# EAGLE board arduino shield - Copy (EAGLE 7.5.0)
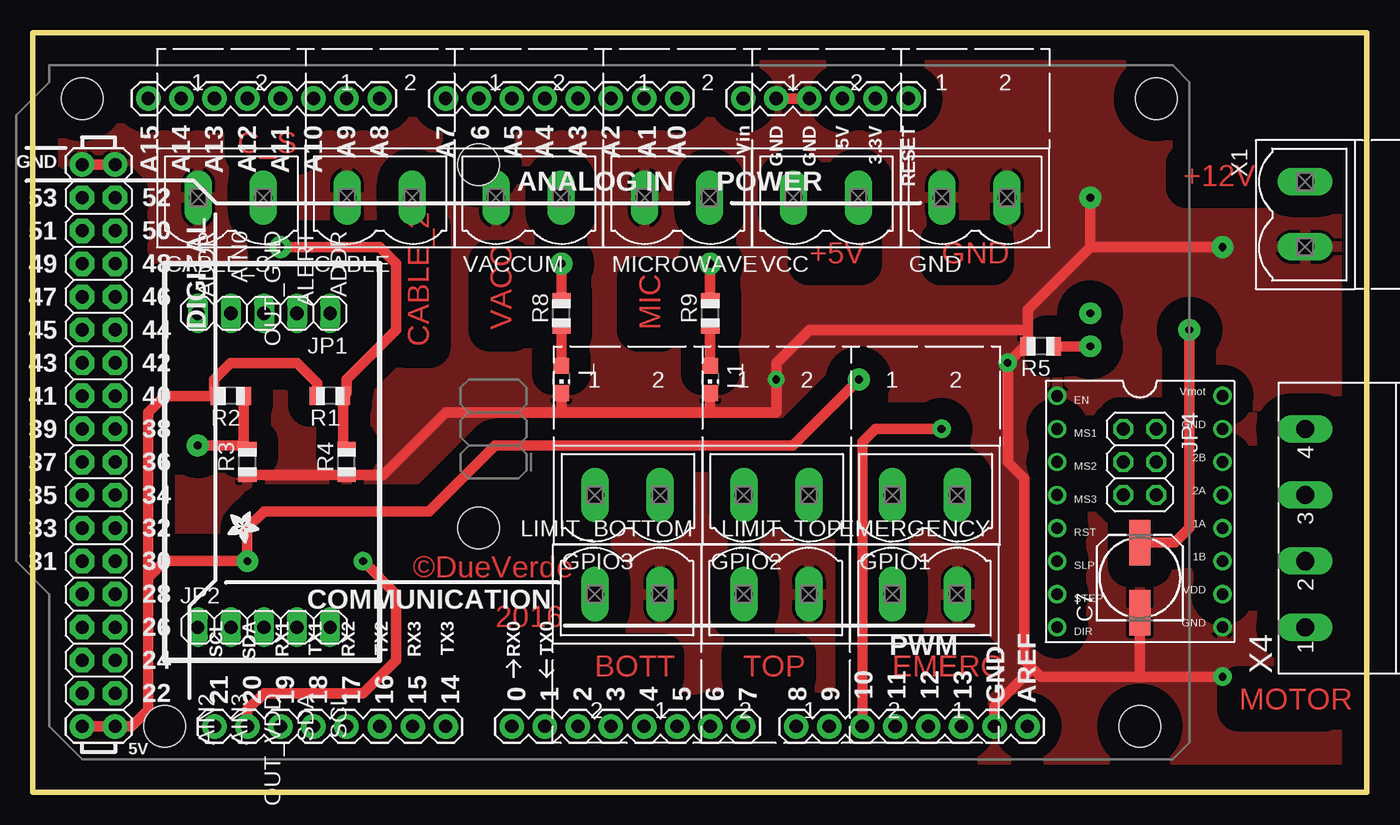
[diagram p0: board, top side]
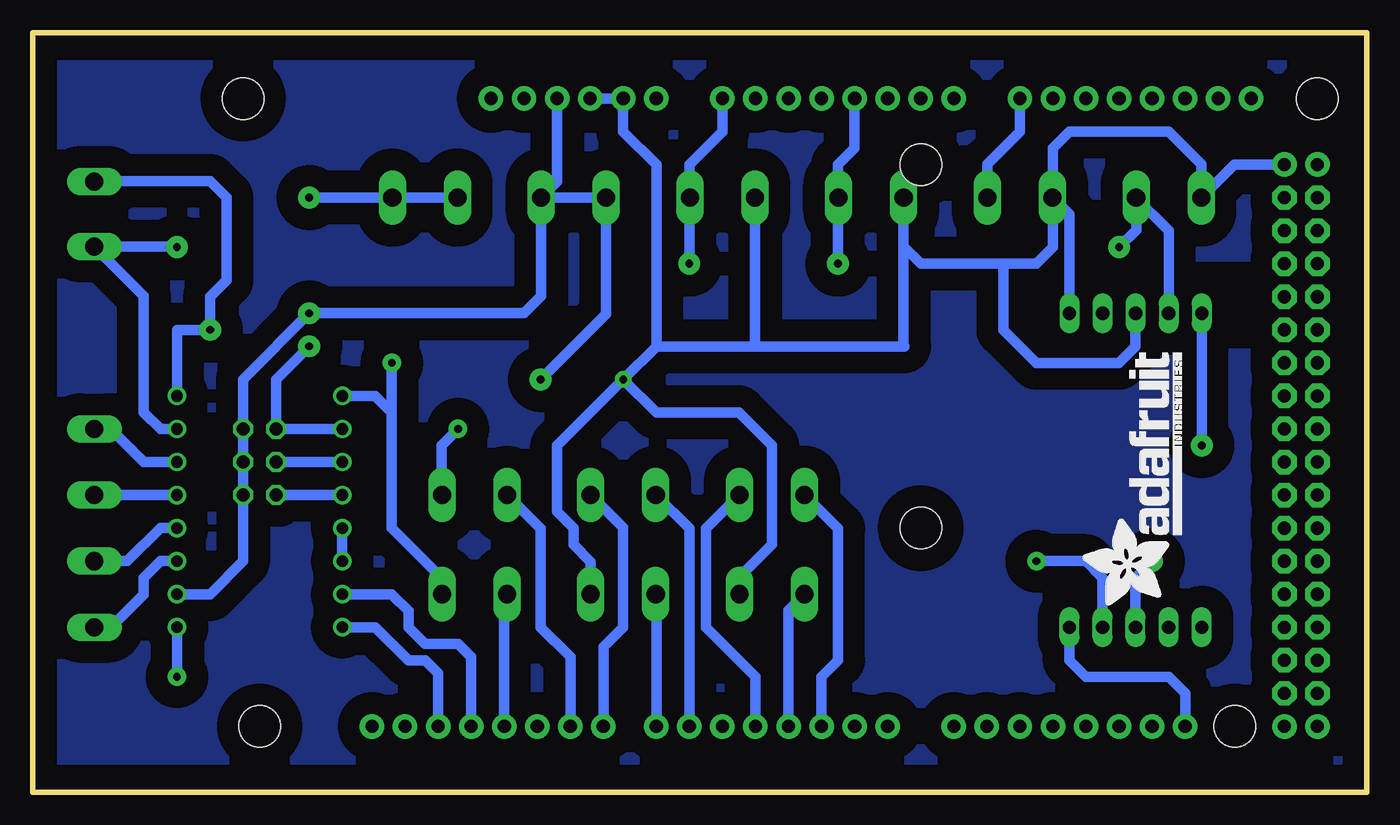
[diagram p1: board, bottom side, seen from below]

Size 102.54 x 58.41 mm. Coordinates in mm from the lower left corner, seen from the top.
Outline: 0,0 102.54,0 102.54,58.41 0,58.41 0,0
Copper layers (1*16): Top 0.035mm / dielectric 1.5mm / Bottom 0.035mm
Design rules "default": minimum track width 10mil, minimum drill 24mil, track to track 8mil, track to pad 8mil, pad to pad 8mil, via to via 8mil, smd to smd 8mil, copper to edge 40mil, drill to drill 8mil, minimum pad ring 10mil, minimum via ring 8mil, stop-mask expansion 4mil, vias tented up to drill 0mil, thermal gap 10mil
Net classes: 2 gnd: width 0.203 mm, drill 0.559 mm, clearance 0.152 mm

## Footprints (pad centres in the part's own frame; a part is rotated, then mirrored left to right if it is on the bottom)
153CLV-0605 = smd 3.5 x 1.6: + 2.7,0; - -2.7,0
MSTBV2 = drill 1.397 long: 1 -2.5,0; 2 2.5,0
1X05 = drill 1.016 long: 1 -5.08,0; 2 -2.54,0; 3 0,0; 4 2.54,0; 5 5.08,0
2X03 = drill 1.016 octagon: 1 -2.54,-1.27; 2 -2.54,1.27; 3 0,-1.27; 4 0,1.27; 5 2.54,-1.27; 6 2.54,1.27
CHIP-LED0805 = smd 1.2 x 1.2: A 0,-1.05; C 0,1.05
R0805 = smd 1.1 x 1.4: 1 -1,0; 2 1,0
ARDUINO_MEGA-PRO-5V = drill 1.016 pad 1.88: 0 52.07,50.8; 1 49.53,50.8; 2 46.99,50.8; 3 44.45,50.8; 3.3V 24.13,2.54; 4 41.91,50.8; 5 39.37,50.8; 5V@0 26.67,2.54; 5V@1 82.55,50.8; 5V@2 85.09,50.8; 6 36.83,50.8; 7 34.29,50.8; 8 30.226,50.8; 9 27.686,50.8; 10 25.146,50.8; 11 22.606,50.8; 12 20.066,50.8; 13 17.526,50.8; 14 57.15,50.8; 15 59.69,50.8; 16 62.23,50.8; 17 64.77,50.8; 18 67.31,50.8; 19 69.85,50.8; 20 72.39,50.8; 21 74.93,50.8; A0 39.37,2.54; A1 41.91,2.54; A2 44.45,2.54; A3 46.99,2.54; A4 49.53,2.54; A5 52.07,2.54; A6 54.61,2.54; A7 57.15,2.54; A8 62.23,2.54; A9 64.77,2.54; A10 67.31,2.54; A11 69.85,2.54; A12 72.39,2.54; A13 74.93,2.54; A14 77.47,2.54; A15 80.01,2.54; AREF 12.446,50.8; GND@0 29.21,2.54; GND@1 31.75,2.54; GND@2 82.55,7.62; GND@3 85.09,7.62; GND@4 14.986,50.8; RESET 21.59,2.54; VIN 34.29,2.54 | drill 1.016 pad 1.88 octagon: 22 82.55,48.26; 23 85.09,48.26; 24 82.55,45.72; 25 85.09,45.72; 26 82.55,43.18; 27 85.09,43.18; 28 82.55,40.64; 29 85.09,40.64; 30 82.55,38.1; 31 85.09,38.1; 32 82.55,35.56; 33 85.09,35.56; 34 82.55,33.02; 35 85.09,33.02; 36 82.55,30.48; 37 85.09,30.48; 38 82.55,27.94; 39 85.09,27.94; 40 82.55,25.4; 41 85.09,25.4; 42 82.55,22.86; 43 85.09,22.86; 44 82.55,20.32; 45 85.09,20.32; 46 82.55,17.78; 47 85.09,17.78; 48 82.55,15.24; 49 85.09,15.24; 50 82.55,12.7; 51 85.09,12.7; 52 82.55,10.16; 53 85.09,10.16 | hole 3.2: 3.81,50.8; 2.54,2.54; 54.61,35.56; 54.61,7.62; 78.74,50.8; 85.09,2.54
A4988BREAKOUT = drill 0.9: 1A 8.89,1.27; 1B 11.43,1.27; 2A 6.35,1.27; 2B 3.81,1.27; DIR 16.51,-11.43; EN -1.27,-11.43; GND 16.51,1.27; GND@0 1.27,1.27; MS1 1.27,-11.43; MS2 3.81,-11.43; MS3 6.35,-11.43; RST 8.89,-11.43; SLP 11.43,-11.43; STEP 13.97,-11.43; VDD 13.97,1.27; VMOT -1.27,1.27
MSTBA4 = drill 1.397 long: 1 -7.62,5.08; 2 -2.54,5.08; 3 2.54,5.08; 4 7.62,5.08

## Placement (x,y rotation side)
C7  100uF  [153CLV-0605]  85.09,16.51 90 top
CABLE  [MSTBV2]  26.67,45.72 0 top
CABLE_S  [MSTBV2]  15.24,45.72 0 top
EMERGENCY  [MSTBV2]  68.58,15.24 180 top
GND  [MSTBV2]  72.39,45.72 0 top
GPIO1  [MSTBV2]  68.58,22.86 0 top
GPIO2  [MSTBV2]  57.15,22.86 0 top
GPIO3  [MSTBV2]  45.72,22.86 0 top
JP1  [1X05]  17.78,36.83 180 top
JP2  [1X05]  17.78,12.7 0 top
JP4  [2X03]  85.09,25.4 270 top
L  YELLOW  [CHIP-LED0805]  40.64,31.75 180 top
L1  YELLOW  [CHIP-LED0805]  52.07,31.75 180 top
LIMIT_BOTTOM  [MSTBV2]  45.72,15.24 180 top
LIMIT_TOP  [MSTBV2]  57.15,15.24 180 top
MICROWAVE  [MSTBV2]  49.53,45.72 0 top
R1  100k  [R0805]  22.86,30.48 180 top
R2  100k  [R0805]  15.24,30.48 180 top
R3  100k  [R0805]  16.51,25.4 90 top
R4  100k  [R0805]  24.13,25.4 90 top
R5  100k  [R0805]  77.47,34.29 180 top
R8  100k  [R0805]  40.64,36.83 90 top
R9  100k  [R0805]  52.07,36.83 90 top
U2  ARDUINO-MEGAPRO-5V  [ARDUINO_MEGA-PRO-5V]  88.9,55.88 180 top
U$6  A4988BREAKOUT  [A4988BREAKOUT]  90.17,29.21 270 top
U$15  [ADAFRUIT_TEXT_20MM]  14.22,14.22 90 bottom
U$16  [ADAFRUIT_2.5MM]  14.99,21.59 270 top
VACCUM  [MSTBV2]  38.1,45.72 0 top
VCC  [MSTBV2]  60.96,45.72 0 top
X1  [MSTBV2]  97.79,44.45 270 top
X4  MSTBA4  [MSTBA4]  102.87,20.32 90 top

## Library data of the parts
C7 R1-R5 R8 R9 = adafruit
CABLE CABLE_S EMERGENCY GND GPIO1-GPIO3 LIMIT_BOTTOM LIMIT_TOP MICROWAVE VACCUM VCC X1 = con-phoenix-500; OC_FARNELL: unknown; OC_NEWARK: unknown
JP1 JP2 JP4 = pinhead
L L1 = led
U2 = sparkfun
U$6 = RepRapjr
U$15 U$16 = microbuilder
X4 = con-phoenix-508

## Nets
+12V: C7.+ U$6.VMOT X1.1
ADDR: JP1.1
AIN0: R2.1 R3.2
AIN1: CABLE_S.2 R1.1 R4.2
AIN4: JP2.1
ALERT: JP1.2
CABLE_2: CABLE.2 U2.A8
EMERGENCY: EMERGENCY.2 U2.11
GND: C7.- CABLE.1 CABLE_S.1 EMERGENCY.1 GND.1 GND.2 JP1.3 L1.C L.C LIMIT_BOTTOM.1 LIMIT_TOP.1 MICROWAVE.1 R3.1 R4.1 R5.2 U2.GND@0 U2.GND@1 U2.GND@2 U2.GND@3 U2.GND@4 U$6.EN U$6.GND U$6.GND@0 VACCUM.1 X1.2
LIMIT_BOTTOM: LIMIT_BOTTOM.2 U2.3
LIMIT_TOP: LIMIT_TOP.2 U2.7
MICROWAVE: MICROWAVE.2 R9.2 U2.A0
N$1: L.A R8.1
N$2: L1.A R9.1
N$3: GPIO1.2 U2.10
N$4: GPIO1.1 U2.9
N$5: GPIO2.2 U2.8
N$6: GPIO2.1 U2.6
N$7: GPIO3.2 U2.4
N$8: GPIO3.1 U2.2
N$14: JP4.1 R5.1 U$6.MS1
N$15: JP4.3 U$6.MS2
N$19: JP4.5 U$6.MS3
N$20: U$6.RST U$6.SLP
N$21: U$6.2B X4.4
N$22: U$6.2A X4.3
N$26: U$6.1A X4.2
N$27: U$6.1B X4.1
S$3: JP1.4
SCL: JP2.5 U2.21
SDA: U2.20
SDA1: JP2.4
VACCUM: R8.2 U2.A4 VACCUM.2
VCC: JP2.3 JP4.2 JP4.4 JP4.6 R1.2 R2.2 U2.5V@0 U2.5V@1 U2.5V@2 U$6.VDD VCC.1 VCC.2
X-DIR: U2.13 U$6.DIR
X-STEP: U2.12 U$6.STEP

## Tracks (layer width: path | path; a pad name or v marks a point on that pad's centre or on a via)
+12V  (via drill 0.6 pad 1.68)
  Top 0.813: C7.+ 87.79,19.21 88.9,20.32 v88.9,35.56
  Bottom 0.813: U$6.VMOT 91.44,35.56 v88.9,35.56 88.9,38.1 87.63,39.37 87.63,45.72 88.9,46.99 97.75,46.99 X1.1
ADDR
  Bottom 0.813: JP1.1 22.86,44.45 24.13,45.72
AIN0  (via drill 0.6 pad 1.68)
  Top 0.813: 16.24,26.67 v12.7,26.67 | R2.1 16.24,26.67 | 16.24,26.67 R3.2
  Bottom 0.813: v12.7,26.67 12.7,36.83
AIN1  (via drill 0.6 pad 1.68)
  Top 0.813: R4.2 23.86,26.67 R1.1 24.13,30.75 24.13,31.75 27.94,35.56 27.94,40.64 26.67,41.91 v19.05,41.91
  Bottom 0.813: CABLE_S.2 17.74,43.22 v19.05,41.91
CABLE_2
  Bottom 0.813: CABLE.2 29.17,48.3 26.67,50.8 U2.A8
EMERGENCY
  Bottom 0.813: U2.11 66.29,15.03 EMERGENCY.2
EXCLUDE
  cutout Top (isolate 0.61, rank 6): 8.89,34.29 26.67,34.29 26.67,40.64 8.89,40.64
GND  (via drill 0.6 pad 1.27, 0.6 pad 1.42, 0.6 pad 1.68)
  Top 0.813: U2.GND@3 U2.GND@2 | U2.GND@1 U2.GND@0 | L.C 40.64,29.21 | 40.64,29.21 52.07,29.21 | 52.07,29.21 L1.C | 52.07,29.21 57.15,29.21 v57.15,31.75 57.15,33.02 59.69,35.56 76.47,35.56 | v81.28,45.72 81.28,41.91 | v91.44,41.91 81.28,41.91 | v91.44,8.89 85.09,8.89 | 85.09,8.89 77.47,8.89 76.83,9.53 | 76.83,9.53 76.2,10.16 76.2,24.13 74.93,25.4 v74.93,33.02 76.2,34.29 R5.2 76.47,35.56 | U2.GND@4 73.91,6.6 76.83,9.53 | C7.- 85.09,8.89 | R3.1 R4.1 26.94,24.4 31.75,29.21 40.64,29.21 | 76.47,35.56 76.47,37.1 81.28,41.91
  Bottom 0.813: U$6.GND@0 92.71,27.94 93.98,29.21 93.98,38.14 X1.2 91.48,41.95 v91.44,41.91 | U2.GND@0 U2.GND@1 57.15,50.8 54.61,48.26 54.61,34.29 | MICROWAVE.1 47.03,34.33 46.99,34.29 | 46.99,34.29 54.61,34.29 | 46.99,34.29 35.56,34.29 35.6,34.33 VACCUM.1 35.6,41.95 34.29,40.64 27.94,40.64 | U2.GND@2 10.2,48.26 CABLE_S.1 12.74,48.3 15.24,50.8 22.86,50.8 24.13,49.53 24.13,45.76 CABLE.1 24.13,45.68 24.13,41.91 25.4,40.64 27.94,40.64 | 54.61,34.29 v57.15,31.75 | GND.1 GND.2 v81.28,45.72 | EMERGENCY.1 71.08,16.47 74.93,20.32 74.93,29.21 | 74.93,29.21 76.2,30.48 U$6.EN | v74.93,33.02 74.93,29.21 | U$6.GND v91.44,8.89 | LIMIT_TOP.1 59.65,17.74 60.96,19.05 60.96,20.32 62.23,21.59 62.23,26.67 v57.15,31.75 | LIMIT_BOTTOM.1 48.22,16.55 45.72,19.05 45.72,26.67 48.26,29.21 54.61,29.21 v57.15,31.75 | JP1.3 17.78,34.29 19.05,33.02 25.4,33.02 27.94,35.56 27.94,40.64
  pour Top (isolate 1.676): 1.27,2.54 101.6,2.54 101.6,55.88 1.27,55.88
LIMIT_BOTTOM
  Bottom 0.813: U2.3 44.45,14.01 LIMIT_BOTTOM.2
LIMIT_TOP
  Bottom 0.813: U2.7 54.61,15.2 LIMIT_TOP.2
MICROWAVE  (via drill 0.6 pad 1.68)
  Top 0.813: R9.2 v52.07,40.64
  Bottom 0.813: v52.07,40.64 52.07,45.68 MICROWAVE.2 52.07,45.76 52.07,48.26 49.53,50.8 U2.A0
N$1
  Top 0.813: R8.1 L.A
N$2
  Top 0.813: R9.1 L1.A
N$3  (via drill 0.6 pad 1.42)
  Top 0.813: U2.10 63.75,26.92 64.77,27.94 v69.85,27.94
  Bottom 0.813: v69.85,27.94 71.12,26.67 71.12,22.9 GPIO1.2
N$4
  Bottom 0.813: U2.9 61.21,10.41 63.5,12.7 63.5,20.28 GPIO1.1
N$5
  Bottom 0.813: U2.8 58.67,11.18 57.15,12.7 57.15,20.36 GPIO2.2
N$6
  Bottom 0.813: U2.6 52.07,20.28 GPIO2.1
N$7
  Bottom 0.813: U2.4 46.99,8.89 50.8,12.7 50.8,20.28 GPIO3.2
N$8
  Bottom 0.813: U2.2 41.91,8.89 40.64,10.16 40.64,20.28 GPIO3.1
N$14  (via drill 0.6 pad 1.68)
  Top 0.813: R5.1 v81.28,34.29
  Bottom 0.813: U$6.MS1 JP4.1 83.82,31.75 v81.28,34.29
N$15
  Bottom 0.813: U$6.MS2 JP4.3
N$19
  Bottom 0.813: U$6.MS3 JP4.5
N$20
  Bottom 0.813: U$6.RST U$6.SLP
N$21
  Bottom 0.813: X4.4 96.52,27.94 93.98,25.4 U$6.2B
N$22
  Bottom 0.813: X4.3 U$6.2A
N$26
  Bottom 0.813: X4.2 95.25,17.78 92.71,20.32 U$6.1A
N$27
  Bottom 0.813: X4.1 96.52,12.7 93.98,15.24 93.98,16.51 92.71,17.78 U$6.1B
NAME
  pour Bottom (isolate 1.676): 1.27,2.54 101.6,2.54 101.6,55.88 1.27,55.88
S$1  (via drill 0.6 pad 1.42)
  other vias: 25.4,17.78
S$2
  cutout Bottom (rank 5): 8.89,34.29 26.67,34.29 26.67,40.64 8.89,40.64
S$3
  Bottom 0.813: 17.78,45.72 15.24,43.18 JP1.4
SCL
  Bottom 0.813: U2.21 13.97,7.62 15.24,8.89 21.59,8.89 22.86,10.16 JP2.5
SDA
  Top 0.813: U2.20 16.51,6.35 17.78,7.62 25.4,7.62 27.94,10.16 27.94,15.24 25.4,17.78
SDA1
  Bottom 0.813: JP2.4 20.32,16.51 21.59,17.78 25.4,17.78
VACCUM  (via drill 0.6 pad 1.68)
  Top 0.813: R8.2 v40.64,40.64
  Bottom 0.813: v40.64,40.64 40.64,45.68 VACCUM.2 40.64,45.76 40.64,48.26 39.37,49.53 U2.A4
VCC  (via drill 0.6 pad 1.68)
  Top 0.813: U2.5V@2 U2.5V@1 7.62,5.08 8.89,6.35 8.89,16.51 | 8.89,16.51 10.16,17.78 v16.51,17.78 16.51,20.32 17.78,21.59 30.48,21.59 35.56,26.67 58.42,26.67 v63.5,31.75 | 8.89,16.51 8.89,29.21 10.16,30.48 R2.2 13.97,30.75 13.97,31.75 15.24,33.02 20.32,33.02 21.86,31.48 R1.2
  Bottom 0.813: U$6.VDD 88.9,15.24 86.36,17.78 JP4.6 JP4.4 JP4.2 86.36,31.75 v81.28,36.83 64.77,36.83 63.46,38.14 VCC.2 | U2.5V@0 62.23,46.95 VCC.2 | VCC.2 VCC.1 58.46,36.79 v63.5,31.75 | JP2.3 17.78,16.51 v16.51,17.78
X-DIR
  Bottom 0.813: U2.13 71.37,9.14 72.39,10.16 73.66,10.16 76.2,12.7 U$6.DIR
X-STEP
  Bottom 0.813: U2.12 68.83,10.41 69.85,11.43 72.39,11.43 73.66,12.7 73.66,13.97 74.93,15.24 U$6.STEP

## Text on the board
Top: C_S | +12V | +5V | GND | VACC | MIC | CABLE_2 | ©DueVerde | 2016 | BOTT | TOP | EMERG | MOTOR
tNames: ADDR | AIN0 | OUT_GND | ALERT | ADDR | AIN2 | AIN3 | OUT_VDD | SDA | SCL